# Altium PCB CT310高端控制盒左摇杆电路V1.1.PcbDoc
Units mil, origin at the board's own origin, x right, y up, seen from the top; angles counter-clockwise.
Board outline 1470 x 1470 mil, 2 copper layers (Top Layer, Bottom Layer), stack 65.792 mil thick; 2 components, 4 nets, 16 pads, 0 vias.
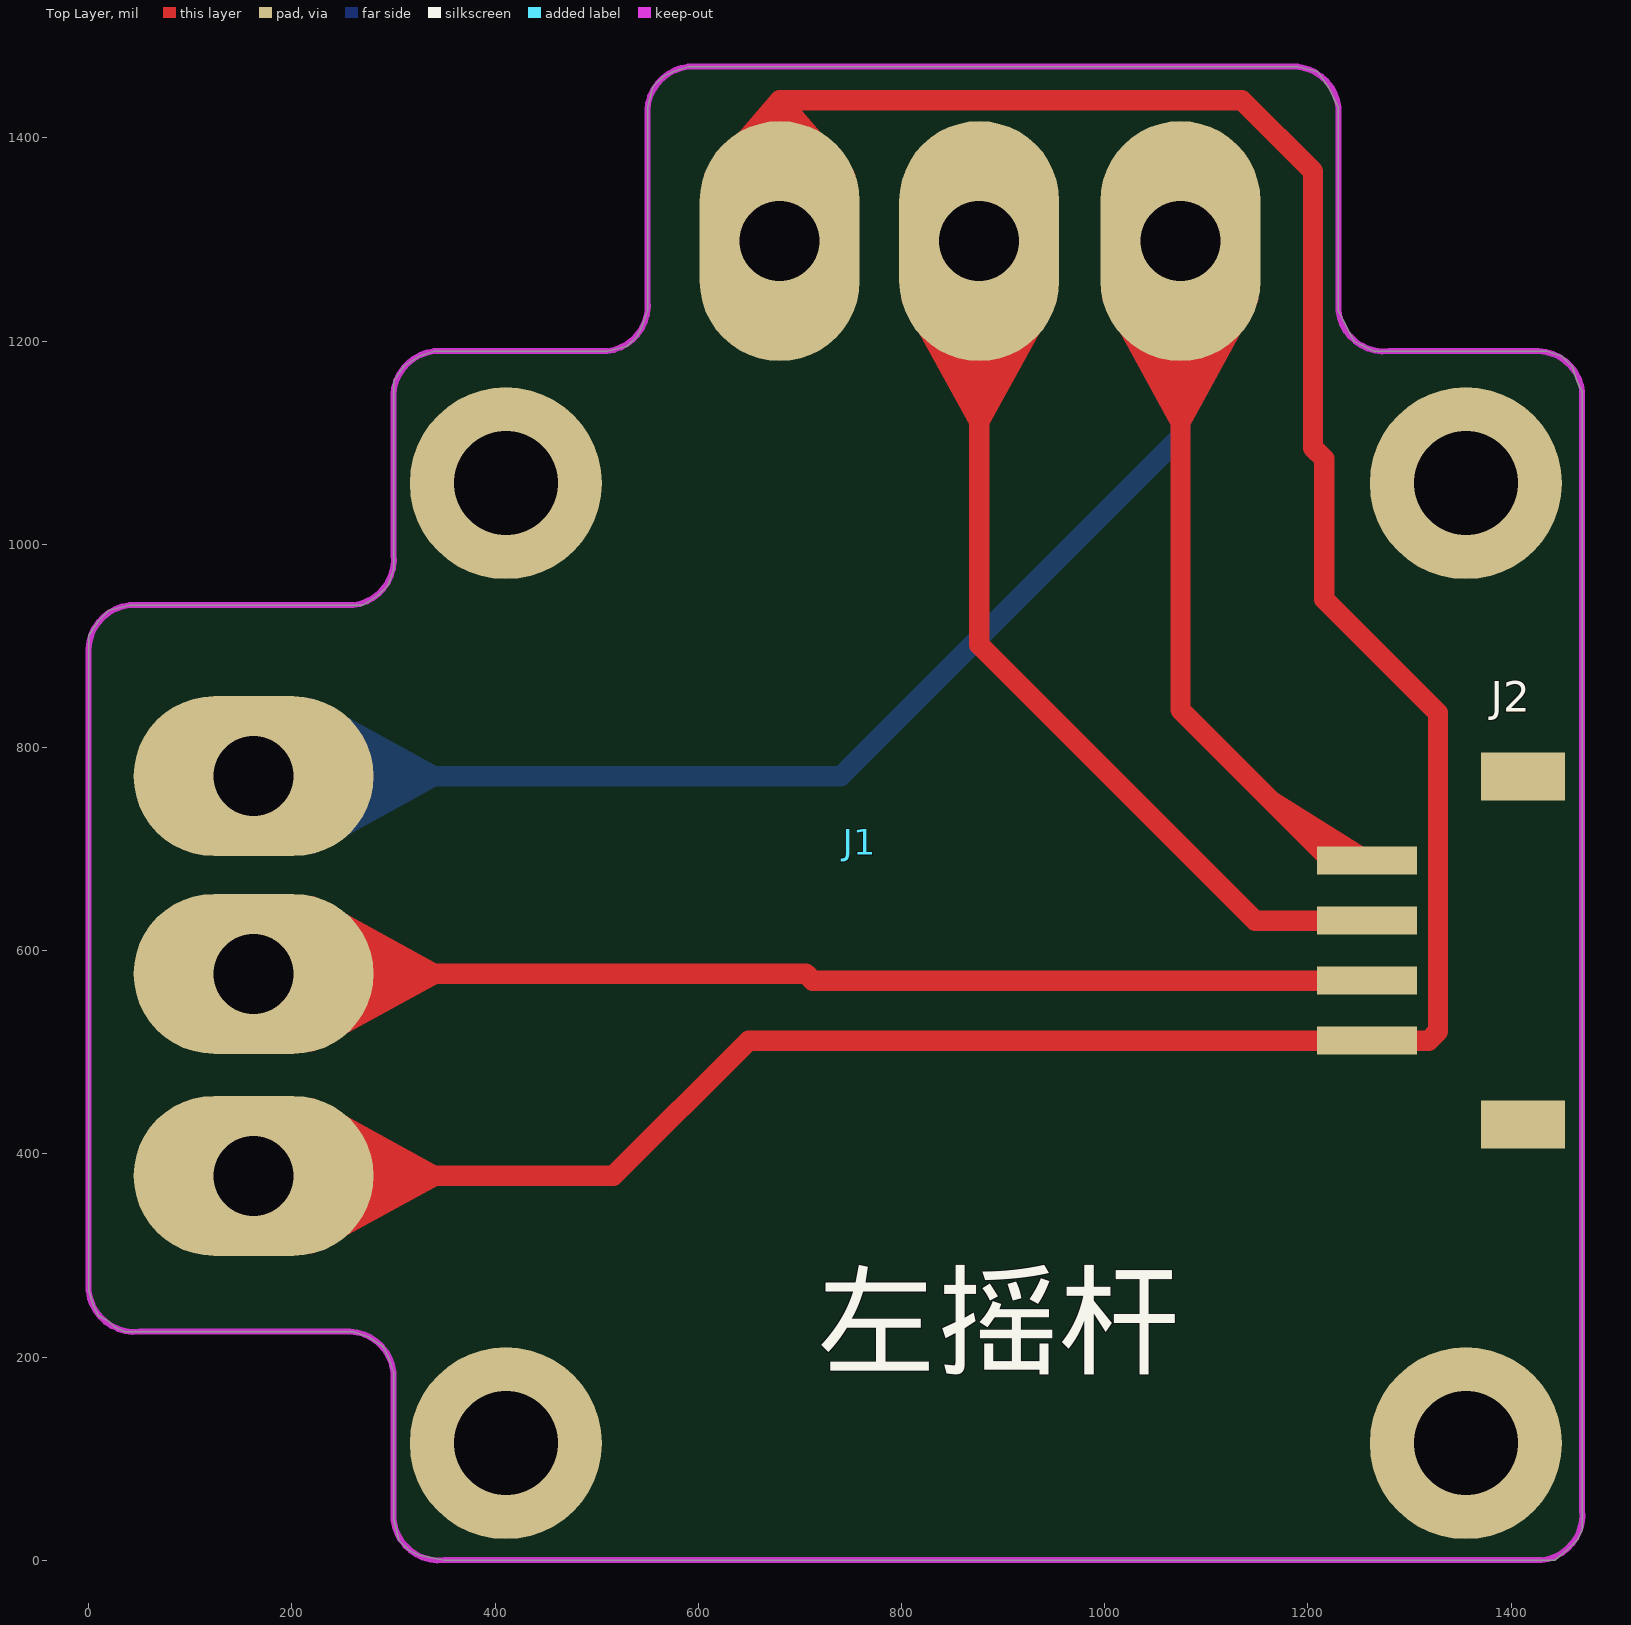
[diagram p0: Top Layer view]
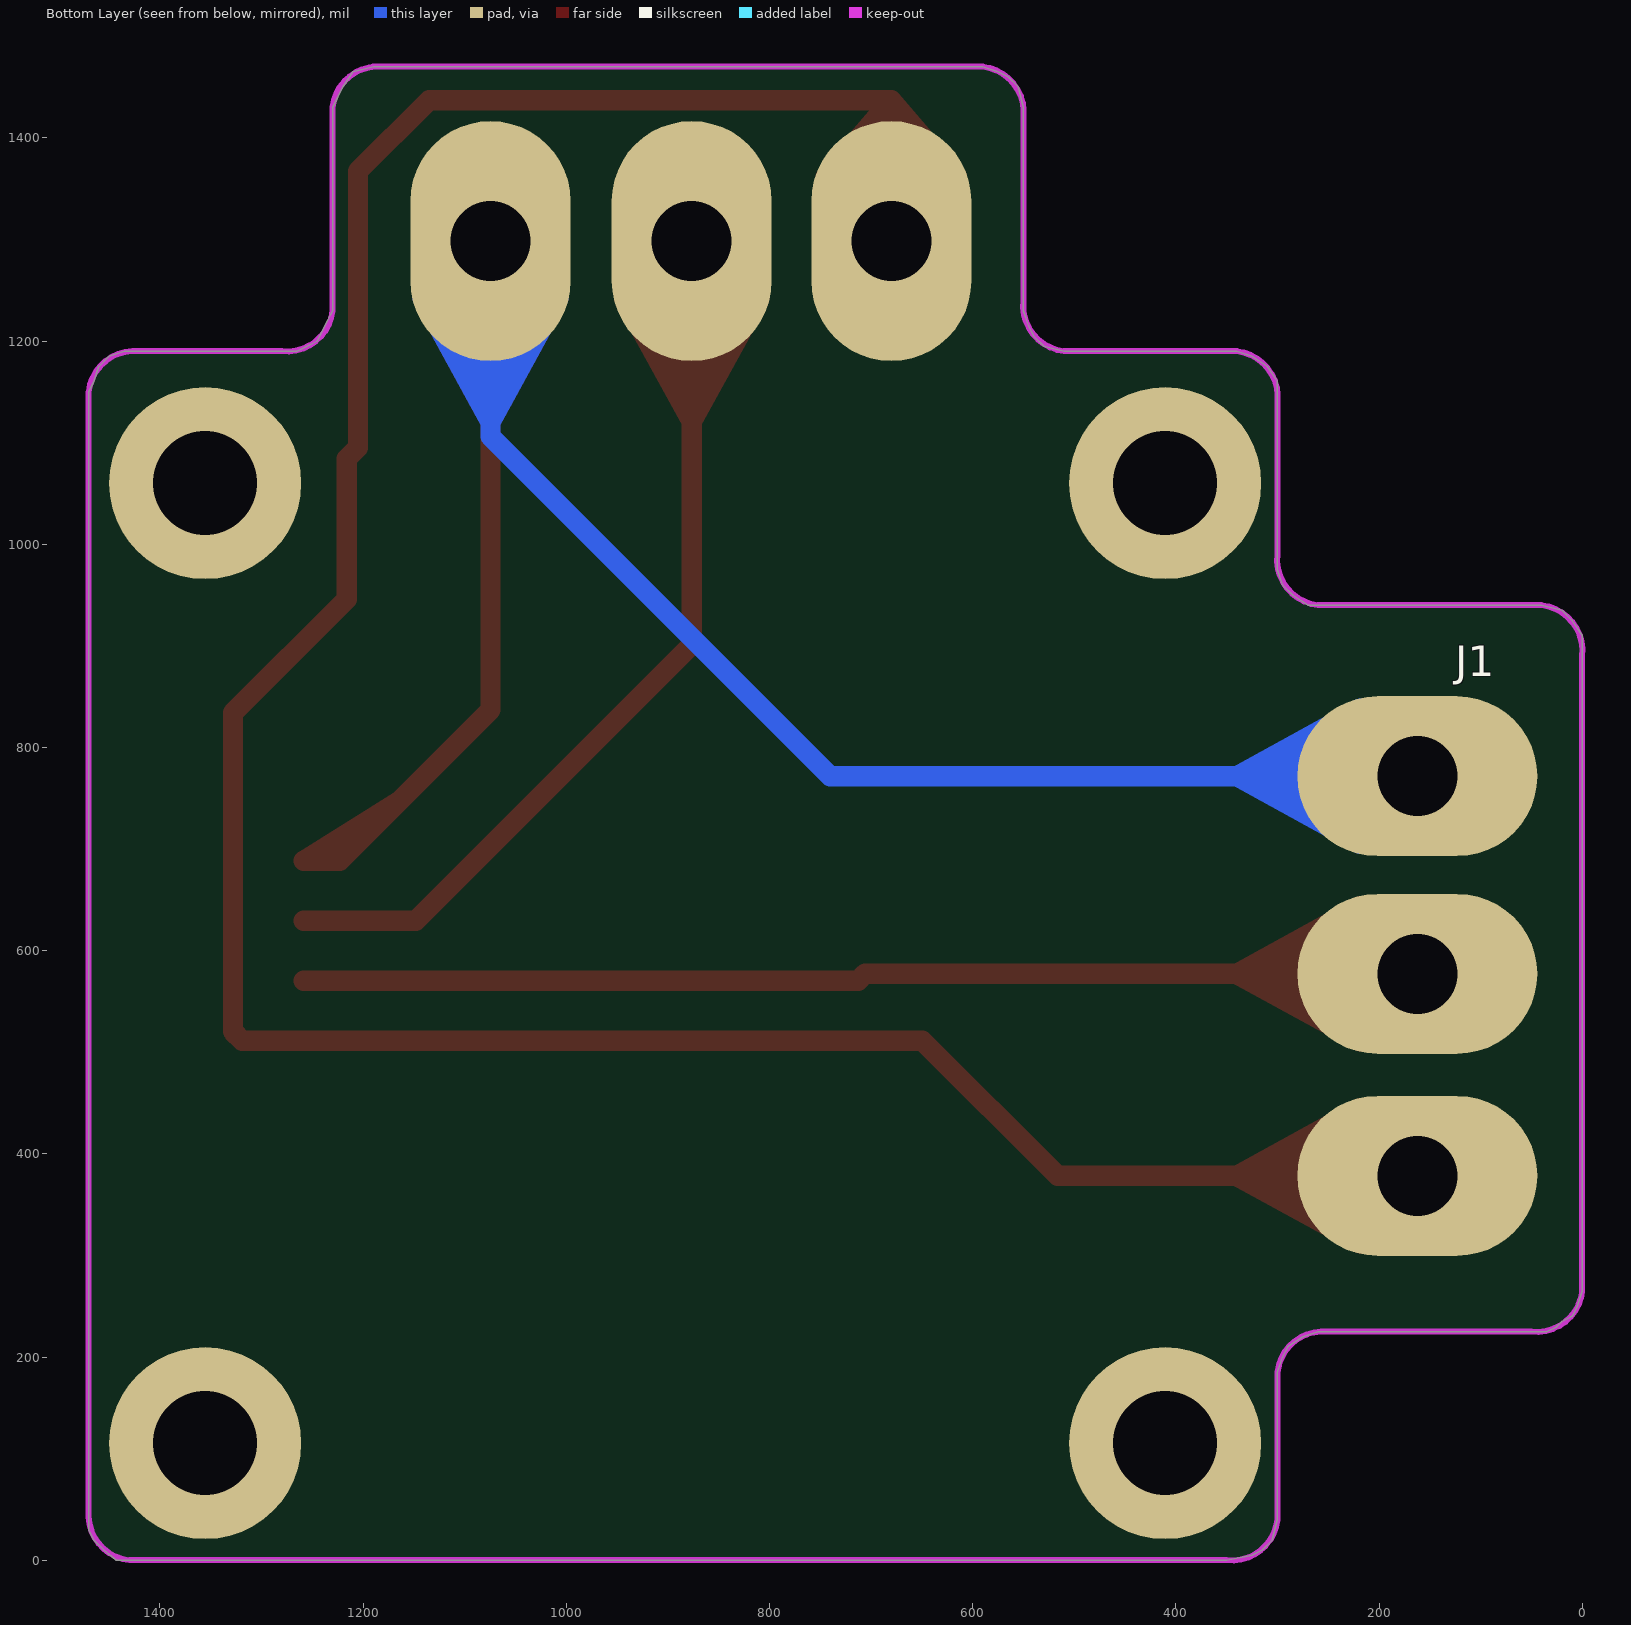
[diagram p1: Bottom Layer view, seen from below]

## Layer stack, top to bottom
Top Layer: signal copper 1.4
Dielectric: core 62.9921, FR-4, Dk 4.8
Bottom Layer: signal copper 1.4

## Board outline
0,890 0,265 5,250 10,240 20,235 25,230 35,225 50,225 250,225 260,225 275,220 290,210 295,200 300,185 300,170 300,40 305,20 315,10 325,5 350,0 425,0 1430,0 1442.95,0 1455,10 1465,20 1470,30 1470,1137.05 1470,1150 1465,1160 1460,1175 1450,1185 1435,1190 1420,1190 1280,1190 1265,1190 1255,1195 1245,1200 1240,1210 1235,1220 1230,1230 1230,1425 1230,1430 1225,1440 1220,1450 1210,1465 1190,1470 590,1470 575,1465 565,1460 555,1450 550,1430 550,1410 550,1230 545,1215 540,1205 530,1195 510,1190 340,1190 325,1185 310,1175 300,1160 300,1140 300,990 300,975 295,960 285,950 270,940 260,940 40,940 20,935 10,925 0,910 0,885

## Design rules (kind name [scope] priority, off if disabled: settings)
Clearance [All] p1: gap=10
PolygonConnect [All] p1: connectstyle=Relief reliefconductorwidth=10 reliefentries=4 polygonreliefangle="90 Angle" airgapwidth=10
RoutingVias [All] p1: holewidth=28 width=50 viastyle="Through Hole" minholewidth=28 minwidth=50 maxholewidth=28 maxwidth=50
SilkToSolderMaskClearance SilkscreenOverComponentPads [IsPad] p1: minsilkscreentomaskgap=10 clearancetoexposedcopper=TRUE
SolderMaskExpansion [All] p1: expansion=4
Width [All] p1: maxlimit=100 minlimit=20 preferedwidth=20 minimp=50.000000 maximp=50.000000 favimp=50.000000
27 further rules are at their usual default settings.

## Components (designator, comment, footprint, x,y, rotation, side; value= is the part's Value field where it differs from the comment)
J1 "H20JH" H20JH 1355.43,115.16 r90 top
J2 "ZH1X4WT-1.5" ZH1X4WT-1.5 1335,600 r270 top

## Footprints (in the part's own frame and the unit in brackets; to place one, negate y for a bottom-side part, rotate by r counter-clockwise, add the part's x,y. Pads: shape width x height; smd on the part's side, far side on the other; paste and mask are expansions set on the pad)
H20JH [mm]
  round 4.8 hole 2.6: 0(0,24) 0(0,0) 0(24,24) 0(24,0)
  oval 6x4 hole 2: 1(30.055,7.135) 2(30.055,12.165) 3(30.055,17.155)
  oval 4x6 hole 2: 4(16.675,30.305) 5(11.735,30.305) 6(6.685,30.305)
  body extent -3,-2.98 37.5,37.52, height 3.7
ZH1X4WT-1.5 [mm]
  rect 1.2x2.1 smd: 0(-4.35,1.95) 0(4.35,1.95)
  rect 0.7x2.5 smd: 1(-2.25,-1.95) 2(-0.75,-1.95) 3(0.75,-1.95) 4(2.25,-1.95)

## Part data
J1: library part HEADER1X6
J2: library part HEADER1X4

## Nets (pads, with @x,y where several pads share a name; then routed paths per layer and width w, separated by ;. In a path a pad name is that pad's centre, name@x,y a point inside that pad or via, vN(x,y) a via of type N, cw(c..) or ccw(c..) an arc to the next point about the centre after c; other vN are vias at no path point)
AX: J1.2 J2.2 | length 1936.5
  Top Layer w20: J1.2@809.9,1242.02 876.5,1120.31 ; J1.2@828.51,1250.49 876.5,1120.31 ; J1.2@847.91,1256.08 876.5,1120.31 ; J1.2@876.5,1259.05 876.5,1120.31 ; J1.2 876.5,901.03 1148,629.53 J2.2 ; J1.2@905.08,1256.08 876.5,1120.31 ; J1.2@924.48,1250.49 876.5,1120.31 ; J1.2@943.09,1242.02 876.5,1120.31 ; 1149.02,629.53 J2.2@1222.79,629.53
AY: J1.5 J2.3 | length 2143.6
  Top Layer w20: J1.5 706,577.17 712.69,570.47 J2.3 ; J1.5@201.69,577.17 340.43,577.17 ; J1.5@204.67,548.58 340.43,577.17 ; J1.5@204.67,605.75 340.43,577.17 ; J1.5@210.26,529.18 340.43,577.17 ; J1.5@210.26,625.15 340.43,577.17 ; J1.5@218.72,510.57 340.43,577.17 ; J1.5@218.72,643.76 340.43,577.17 ; 1149.02,570.47 J2.3@1222.79,570.47
GND: J1.3 J1.6 J2.4 | length 4579.3
  Top Layer w20: J1.6 516.35,378.35 649.42,511.42 J2.4 1319,511.42 ; J1.6@201.69,378.35 340.43,378.35 ; J1.6@204.67,349.76 340.43,378.35 ; J1.6@204.67,406.93 340.43,378.35 ; J1.6@210.26,330.36 340.43,378.35 ; J1.6@210.26,426.33 340.43,378.35 ; J1.6@218.72,311.75 340.43,378.35 ; J1.6@218.72,444.94 340.43,378.35 ; J1.3@615.56,1361.61 680.04,1437 ; J1.3@632.79,1349.77 680.04,1437 ; J1.3@651.6,1341.96 680.04,1437 ; J1.3 680.04,1437 ; J1.3@680.04,1337.79 680.04,1437 ; J1.3@708.48,1341.96 680.04,1437 ; J1.3@727.29,1349.77 680.04,1437 ; J1.3@744.52,1361.61 680.04,1437 ; 1149.02,511.42 J2.4@1222.79,511.42 ; J2.4@1293.66,511.42 1319,511.42 ; 680.04,1437 1135,1437 1205,1367 1205,1095 1216,1084 1216,946 1328,834 1328,520.42 1319,511.42
VCC: J1.1 J1.4 J2.1 | length 4973.8
  Top Layer w20: J1.1@1007.93,1242.02 1074.53,1120.31 ; J1.1@1026.55,1250.49 1074.53,1120.31 ; J1.1@1045.94,1256.08 1074.53,1120.31 ; J1.1@1074.53,1259.05 1074.53,1120.31 ; J1.1 1074.53,837.05 1223,688.58 J2.1 1164.44,747.14 ; J1.1@1103.11,1256.08 1074.53,1120.31 ; J1.1@1122.51,1250.49 1074.53,1120.31 ; J1.1@1141.13,1242.02 1074.53,1120.31
  Bottom Layer w20: J1.4 740.18,771.65 1074.53,1106 J1.1 ; J1.4@201.69,771.65 340.43,771.65 ; J1.4@204.67,743.07 340.43,771.65 ; J1.4@204.67,800.24 340.43,771.65 ; J1.4@210.26,723.67 340.43,771.65 ; J1.4@210.26,819.64 340.43,771.65 ; J1.4@218.72,705.06 340.43,771.65 ; J1.4@218.72,838.25 340.43,771.65 ; J1.1@1007.93,1242.02 1074.53,1120.31 ; J1.1@1026.55,1250.49 1074.53,1120.31 ; J1.1@1045.94,1256.08 1074.53,1120.31 ; J1.1@1074.53,1259.05 1074.53,1120.31 ; J1.1@1103.11,1256.08 1074.53,1120.31 ; J1.1@1122.51,1250.49 1074.53,1120.31 ; J1.1@1141.13,1242.02 1074.53,1120.31
pads on no net: J1.0 J2.0

## Keep-outs
Keep-Out Layer:
  lines w5.91: 550,1230 550,1430 ; 550,1240 cw(c505,1235) 510,1190 340,1190 ccw(c345,1145) 300,1140 300,990 cw(c255,985) 260,940 40,940 ccw(c45,895) 0,890 0,265 ccw(c45,270) 50,225 250,225 cw(c255,180) 300,185 300,40 ccw(c345,45) 350,0 1430,0 ccw(c1425,45) 1470,50 1470,1150 ccw(c1425,1145) 1420,1190 1280,1190 cw(c1275,1235) 1230,1230 1230,1430 ccw(c1185,1425) 1180,1470 ; 550,1420 cw(c595,1425) 590,1470 1190,1470

## Silkscreen, mask and mechanical layers (free items; w line width, h text height)
Top Overlay:
  text "左摇杆" at 715,165 h150

## Dimensions
1430,0 to 1190,1470 on Keep-Out Layer
1470,50 to 0,265 on Keep-Out Layer